# EAGLE board ChargerControlSchematicV1 (EAGLE 6.2)

Size 181.28 x 80 mm. Coordinates in mm from the lower left corner, seen from the top.
Outline: 81.28,0 181.28,0 181.28,80 81.28,80 81.28,0
Copper layers (1*16): Top 0.035mm / dielectric 1.5mm / Bottom 0.035mm
Design rules: minimum track width 10mil, minimum drill 24mil, track to track 8mil, track to pad 8mil, pad to pad 8mil, via to via 8mil, smd to smd 8mil, copper to edge 40mil, drill to drill 8mil, minimum pad ring 10mil, minimum via ring 8mil, stop-mask expansion 4mil, vias tented up to drill 0mil, thermal gap 10mil

## Footprints (pad centres in the part's own frame; a part is rotated, then mirrored left to right if it is on the bottom)
RELAY-G5Q = drill 1.3: 1 8.89,3.81; 2 -1.27,3.81; 3 -8.89,3.81; 4 -6.35,-3.81; 5 8.89,-3.81
CAP-PTH-SMALL = drill 0.7 pad 1.651: 1 0,0; 2 2.54,0
DIODE-1N4148 = drill 0.9 pad 1.88: A -3.81,0; C 3.81,0
DO41-10 = drill 1.118 pad 1.93: A 5.08,0; C -5.08,0
CDRH2D09 = smd 1.3 x 1.3: P$1 -1.5,0; P$2 1.5,0
TACTILE_SWITCH_TALL = smd 1.55 x 1.3: A1 -3.975,-2.25; A2 3.975,-2.25; B1 -3.975,2.25; B2 3.975,2.25
RELAY-G5V = drill 1.016: 1 5.08,2.54; 2 2.54,2.54; 5 -5.08,2.54; 6 -5.08,-2.54; 9 2.54,-2.54; 10 5.08,-2.54
AXIAL-0.3-KIT = drill 1.016 pad 2.032: P$1 -3.81,0; P$2 3.81,0
1/6W-RES = drill 0.762: 1 -2.5,0; 2 2.5,0
TO92-EBC-OVAL = drill 0.813 long: B 0,-1.27; C 2.54,-1.27; E -2.54,-1.27
POLO_PSHBTN_PWR = drill 0.8 square: P$1 -16.51,0; P$2 -16.51,6.35; P$3 -11.43,6.35; P$4 -11.43,0; P$5 -11.43,3.81
ARDUINO = drill 1 pad 1.676 octagon: 3V 35.56,2.54; 5V 38.1,2.54; A0 50.8,2.54; A1 53.34,2.54; A2 55.88,2.54; A3 58.42,2.54; A4 60.96,2.54; A5 63.5,2.54; AREF 23.876,50.8; D0 63.5,50.8; D1 60.96,50.8; D2 58.42,50.8; D3 55.88,50.8; D4 53.34,50.8; D5 50.8,50.8; D6 48.26,50.8; D7 45.72,50.8; D8 41.656,50.8; D9 39.116,50.8; D10 36.576,50.8; D11 34.036,50.8; D12 31.496,50.8; D13 28.956,50.8; GND 26.416,50.8; GND1 43.18,2.54; GND2 40.64,2.54; RESET 33.02,2.54; VIN 45.72,2.54 | hole 3.2: 15.24,50.8; 66.04,35.56; 13.97,2.54
TO92 = drill 0.813 octagon: 1 -1.27,0; 2 0,1.905; 3 1.27,0
DIODE-ZENER = drill 0.9: P$1 -3.556,0; P$2 3.556,0

## Placement (x,y rotation side)
BMS_RELAY  RELAYPTH  [RELAY-G5Q]  57.15,60.96 0 top
C1  10uF  [CAP-PTH-SMALL]  48.26,78.74 0 top
C2  10uF  [CAP-PTH-SMALL]  43.18,78.74 0 top
D1  [DIODE-1N4148]  43.18,83.82 0 top  (outside the outline)
D2  1N4003  [DIODE-1N4148]  33.02,83.82 0 top  (outside the outline)
D3  1N4004  [DO41-10]  40.64,69.85 0 top
D4  1N4004  [DO41-10]  27.94,69.85 0 top
D5  1N4004  [DO41-10]  15.24,69.85 0 top
HLIM_RELAY  RELAYPTH  [RELAY-G5Q]  35.56,60.96 0 top
L1  40uH 2amp  [CDRH2D09]  35.56,78.74 0 top
LATCH_SWITCH  SWITCH-MOMENTARY-2  [TACTILE_SWITCH_TALL]  3.81,69.85 0 top
PILOT_RELAY  RELAY-2G5Q  [RELAY-G5V]  53.34,71.12 0 top
PREVENT_DRIVE  RELAY-2G5Q  [RELAY-G5V]  -1.27,-5.08 0 top
R1  2.74k  [AXIAL-0.3-KIT]  -3.81,77.47 0 top
R2  1.3k  [AXIAL-0.3-KIT]  63.5,83.82 0 top  (outside the outline)
R3  150 ohm  [AXIAL-0.3-KIT]  26.67,77.47 0 top
R4  330ohm  [AXIAL-0.3-KIT]  16.51,77.47 0 top
R5  1k or 2.2k  [1/6W-RES]  13.97,83.82 0 top  (outside the outline)
R6  1k or 2.2k  [1/6W-RES]  6.35,83.82 0 top  (outside the outline)
R7  2.7k  [AXIAL-0.3-KIT]  53.34,83.82 0 top  (outside the outline)
R8  330ohm  [AXIAL-0.3-KIT]  6.35,77.47 0 top
R9  1k  [1/6W-RES]  -1.27,83.82 0 top  (outside the outline)
R11  10k  [1/6W-RES]  64.77,87.63 0 top  (outside the outline)
T1  2N2222  [TO92-EBC-OVAL]  1.27,60.96 0 top
T2  2N2222  [TO92-EBC-OVAL]  63.5,72.39 0 top
U$1  POLOLU_PSHBTN_PWR  [POLO_PSHBTN_PWR]  24.13,57.15 0 top
U$2  ARDUINOUNO  [ARDUINO]  0,1.27 0 top
V78XX-2000  78L05Z  [TO92]  54.61,78.74 0 top
ZDP_20V  DIODE-ZENERPTH  [DIODE-ZENER]  22.86,83.82 0 top  (outside the outline)

## Library data of the parts
BMS_RELAY C1 C2 D1 D2 HLIM_RELAY L1 LATCH_SWITCH PILOT_RELAY PREVENT_DRIVE R1-R9 R11 ZDP_20V = SparkFun
D3-D5 T1 T2 U$2 = adafruit
U$1 = ChargerControlLibrary
V78XX-2000 = linear

## Nets
3V: U$2.3V
240_AC_GND: LATCH_SWITCH.A2 R8.P$1
AC-DC-12V-OUT: U$2.VIN V78XX-2000.1
CAR_12V+: BMS_RELAY.5 D3.C D4.C L1.P$1 PREVENT_DRIVE.2 U$1.P$4 U$1.P$5 ZDP_20V.P$1
GND: C2.2 PREVENT_DRIVE.9 R1.P$2 R7.P$2 T1.E T2.E U$1.P$1 V78XX-2000.2 ZDP_20V.P$2
GND2: U$2.GND2
HLIM: D5.A D5.C HLIM_RELAY.5 R11.2 U$2.D2
IGNITION_ON: PREVENT_DRIVE.5
IGNITION_ON_SOURCE: PREVENT_DRIVE.6
LCD_A4: U$2.A4
LCD_A5: U$2.A5
N$1: U$2.GND
N$2: U$1.P$2 U$2.GND1
N$3: PILOT_RELAY.10
N$4: R9.1 U$2.D6
N$5: R6.1 U$2.D4
N$6: D2.C R1.P$1 R2.P$1
N$7: R5.2 T1.B
N$8: R2.P$2
N$9: R5.1 U$2.D5
N$10: R4.P$2 R11.1 U$2.5V
N$11: D3.A PILOT_RELAY.9 T1.C
N$12: BMS_RELAY.1 D4.A T2.C
N$13: R6.2 T2.B
N$15: D1.A R9.2
N$16: LATCH_SWITCH.B2 R3.P$2 R8.P$2
N$17: C2.1 L1.P$2 V78XX-2000.3
PILOT: D2.A
PILOT_RELAY: U$1.P$3 U$2.D7
PIN1: HLIM_RELAY.4
PIN2: D1.C HLIM_RELAY.2
PROXIMITY: R3.P$1 R4.P$1 R7.P$1 U$2.A0
VCC: HLIM_RELAY.1

## Tracks (layer width: path | path; a pad name or v marks a point on that pad's centre or on a via)
240_AC_GND  (1 unrouted)
AC-DC-12V-OUT  (1 unrouted)
CAR_12V+  (7 unrouted)
GND  (8 unrouted)
HLIM  (4 unrouted)
N$2  (1 unrouted)
N$4  (1 unrouted)
N$5  (1 unrouted)
N$6  (2 unrouted)
N$7  (1 unrouted)
N$9  (1 unrouted)
N$10  (2 unrouted)
N$11  (2 unrouted)
N$12  (2 unrouted)
N$13  (1 unrouted)
N$15  (1 unrouted)
N$16  (2 unrouted)
N$17  (2 unrouted)
PILOT_RELAY  (1 unrouted)
PIN2  (1 unrouted)
PROXIMITY  (3 unrouted)